# Altium PCB PCB2.PcbDoc
Units mil, origin at the board's own origin, x right, y up, seen from the top; angles counter-clockwise.
Board outline 2090.05 x 2250.22 mil, 2 copper layers (Top Layer, Bottom Layer); 57 components, 45 nets, 467 pads, 88 vias.
Unrouted connection lines stored in the file: 1.
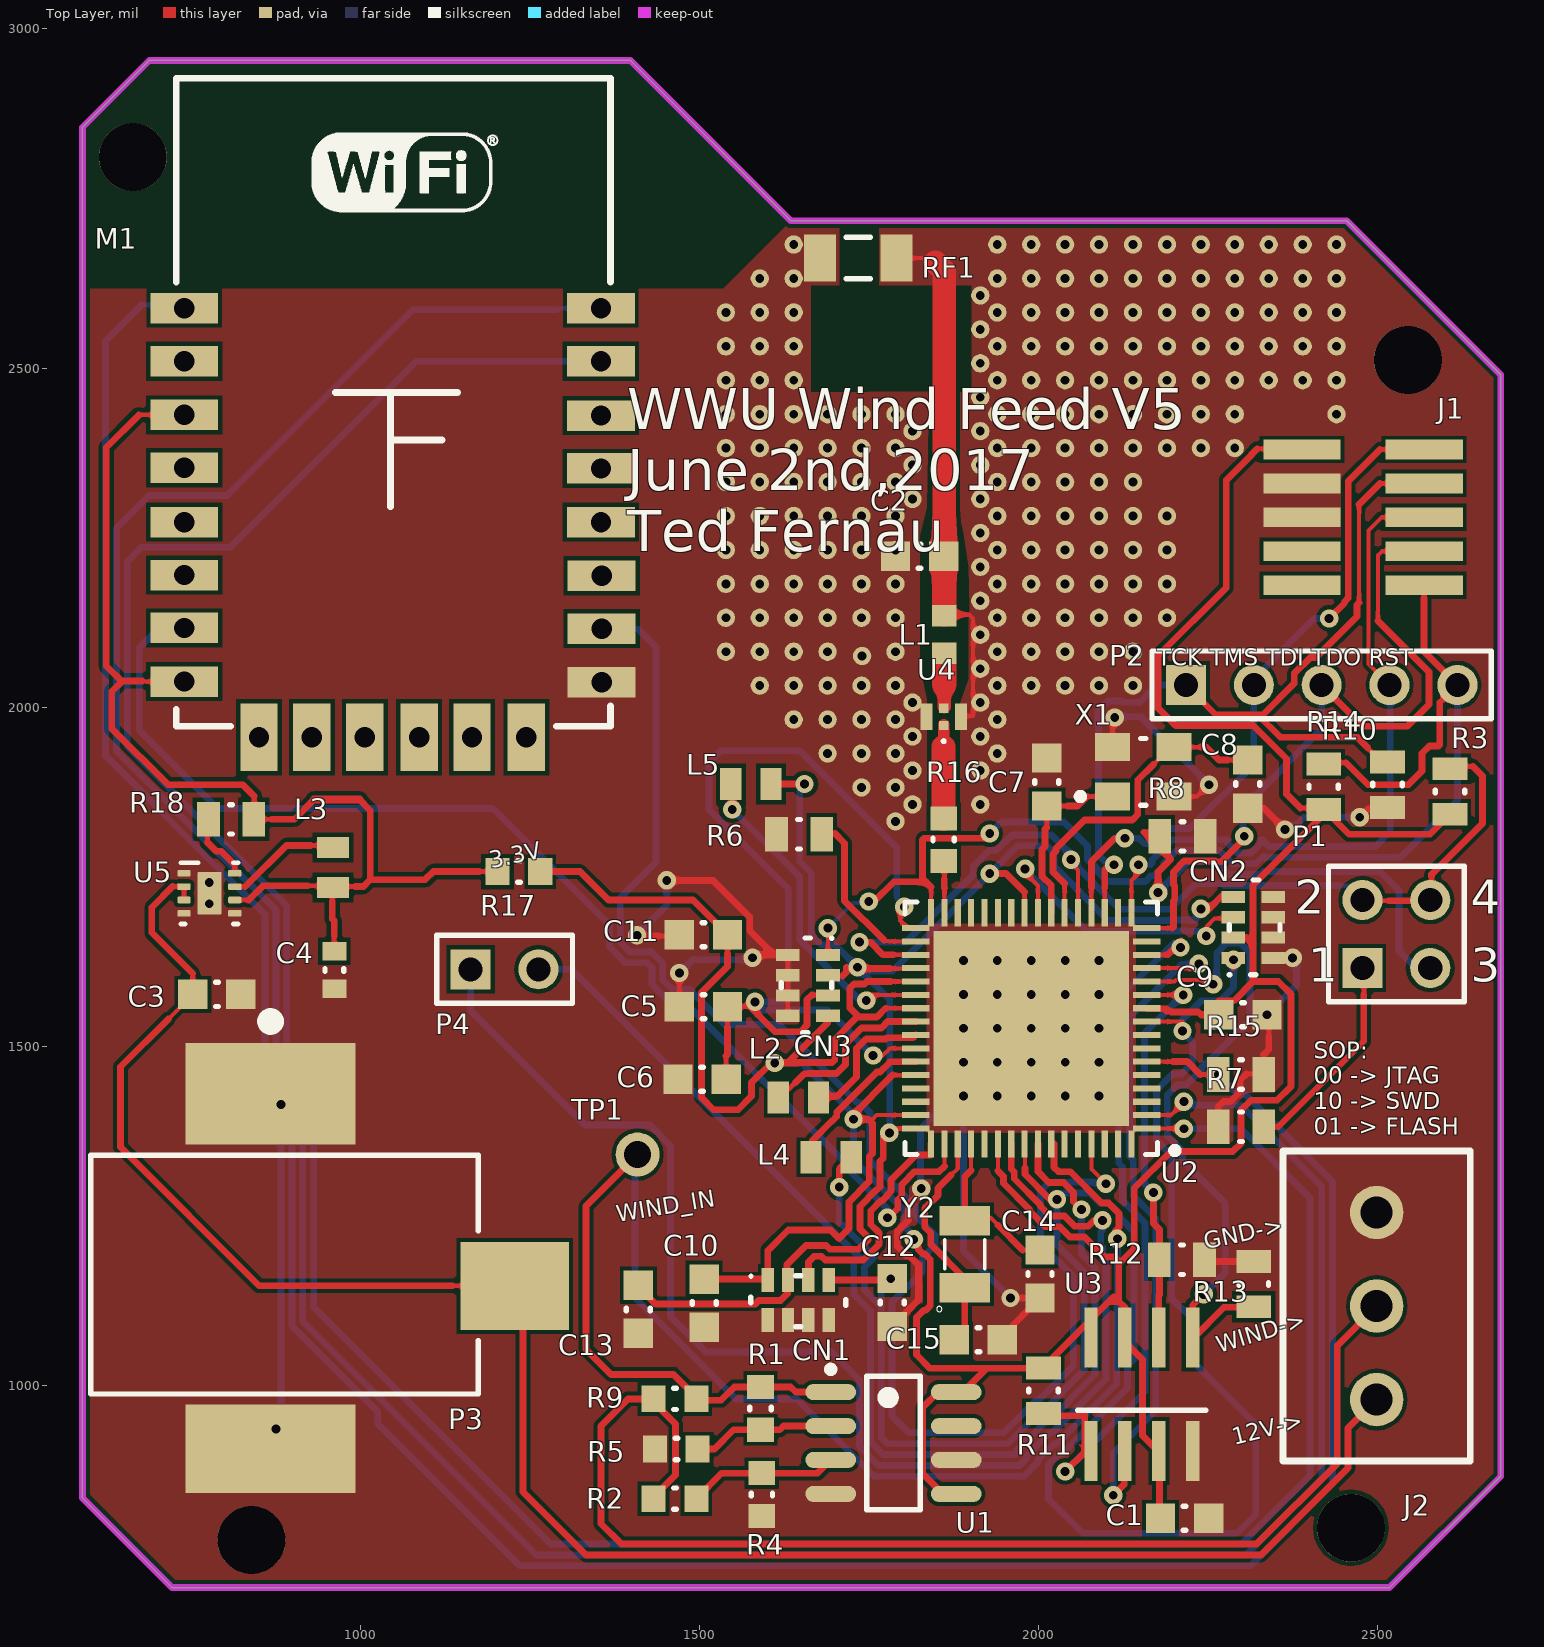
[diagram p0: Top Layer view]
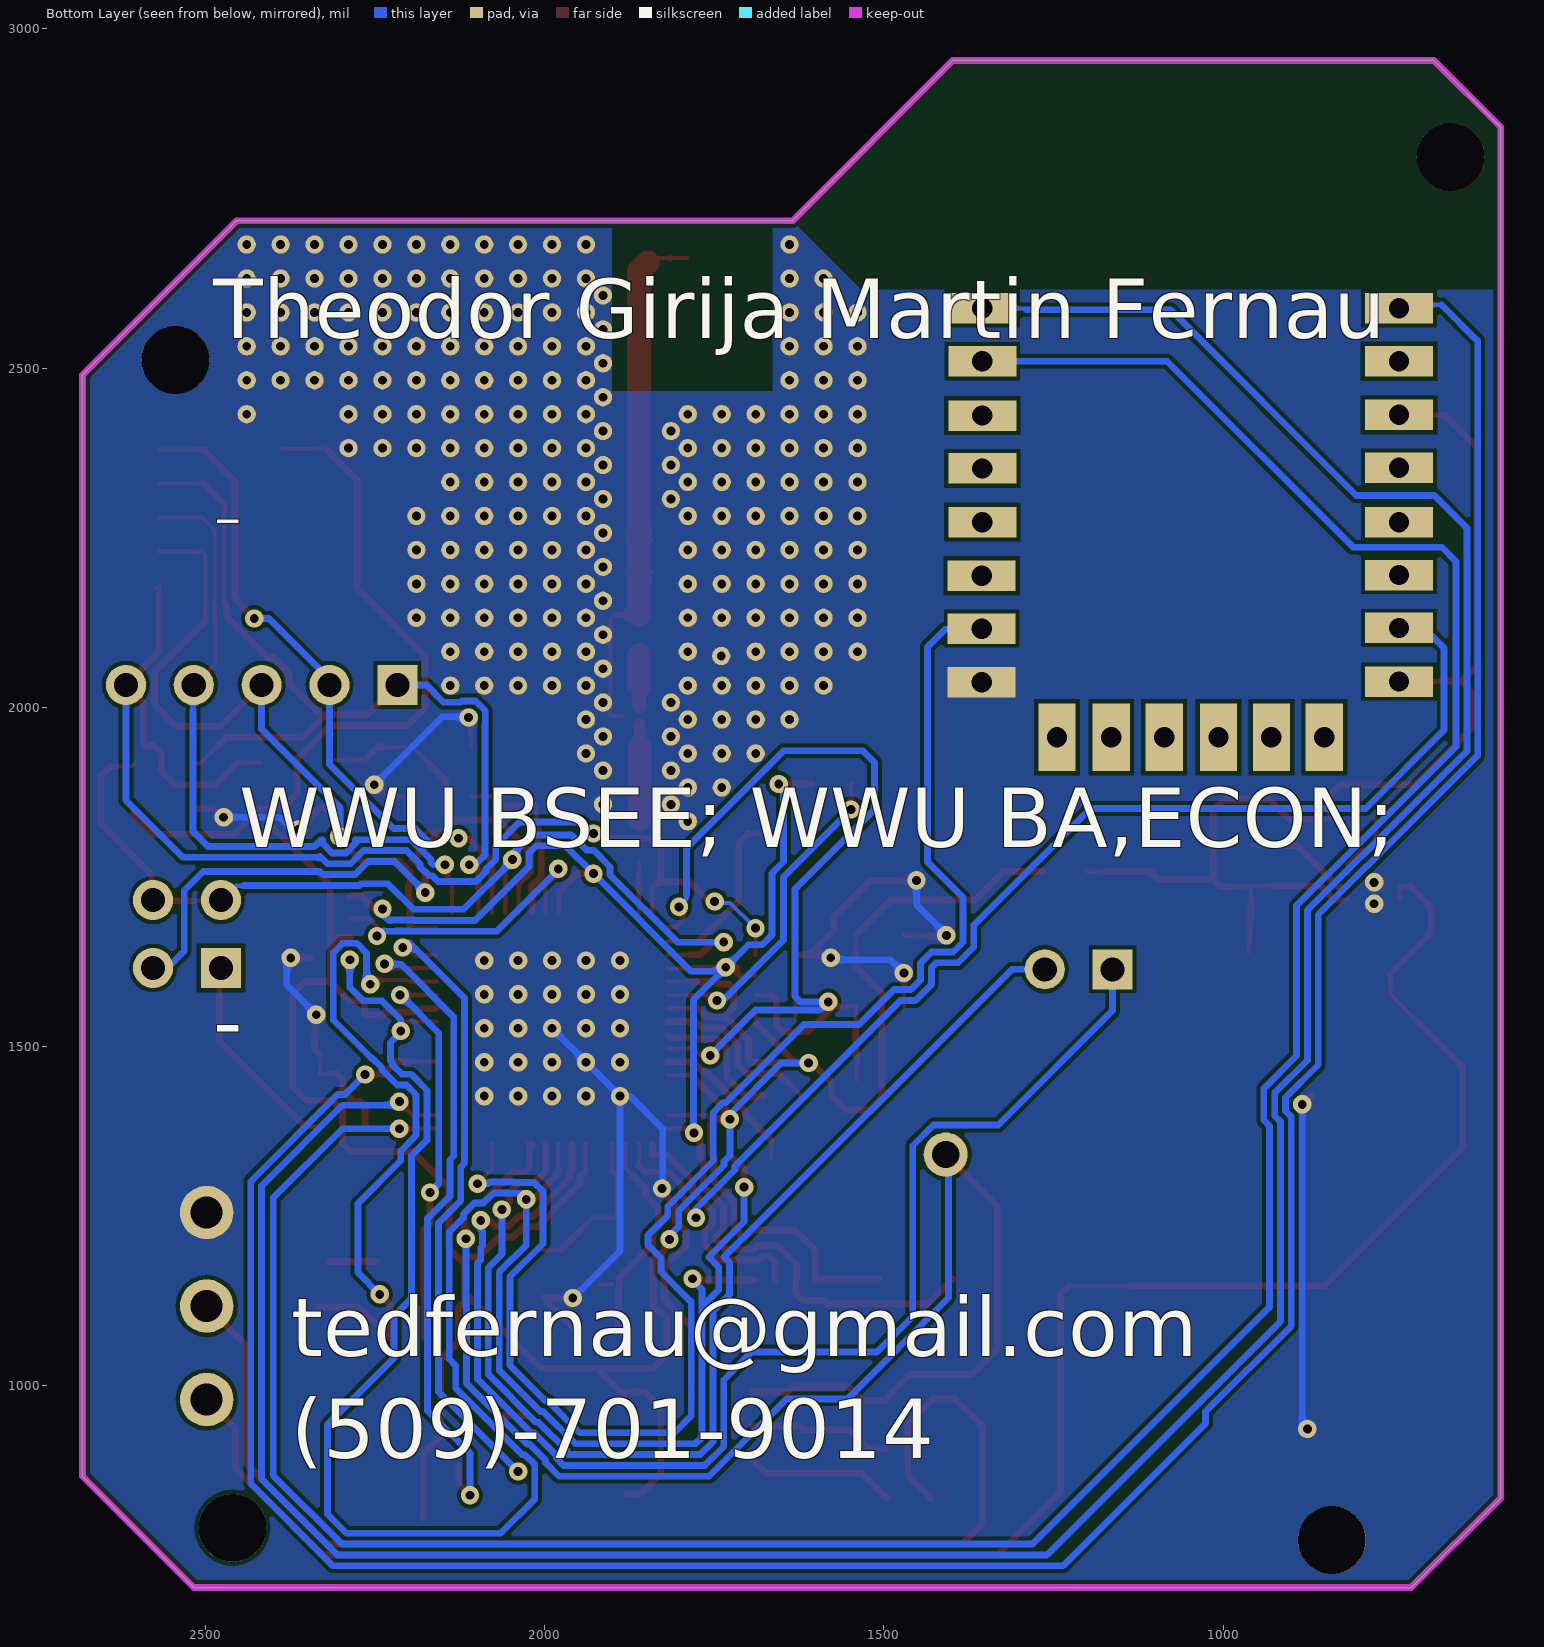
[diagram p1: Bottom Layer view, seen from below]

## Layer stack, top to bottom
Top Solder: solder mask 0.4, Solder Resist, Dk 3.5
Top Layer: signal copper 1.4
Dielectric 1: dielectric 12.6, FR-4, Dk 4.8
Bottom Layer: signal copper 1.4
Bottom Solder: solder mask 0.4, Solder Resist, Dk 3.5

## Board outline
723,703 590.95,835.05 590.95,2854.8 689.38,2953.22 1398.69,2953.22 1634.91,2717 2454,2717 2681,2490 2681,867 2517,703

## Design rules (kind name [scope] priority, off if disabled: settings)
Clearance [All] p1: gap=6 ignorepadtopadclearanceinfootprint=FALSE except(0: Arc-Hole Track-Hole SMDPad-Hole THPad-Hole Via-Hole Fill-Hole Poly-Hole Region-Hole Text-Hole)
HoleSize [All] p1: absolutevalues=TRUE maxlimit=100 minlimit=13 maxpercent=80.000 minpercent=20.000
PolygonConnect PolygonConnect_2 [All vs IsNamedPolygon('GND_POUR')] p1: connectstyle=Direct reliefconductorwidth=10 reliefentries=4 polygonreliefangle="90 Angle" airgapwidth=10
PolygonConnect PolygonConnect_1 [All vs IsNamedPolygon('GND_POUR')] p2: connectstyle=Direct reliefconductorwidth=10 reliefentries=4 polygonreliefangle="90 Angle" airgapwidth=10
PolygonConnect [All] p3: connectstyle=Relief reliefconductorwidth=10 reliefentries=4 polygonreliefangle="90 Angle" airgapwidth=10
RoutingVias [All] p1: holewidth=13 width=27 viastyle="Through Hole" minholewidth=13 minwidth=27 maxholewidth=28 maxwidth=50
SilkToBoardRegionClearance [All] p1 off:
SilkToSilkClearance [All] p1 off: silktosilkclearance=10
SilkToSolderMaskClearance [IsPad] p1 off: minsilkscreentomaskgap=10 clearancetoexposedcopper=TRUE
SolderMaskExpansion [All] p1: expansion=4
Width [All] p1: maxlimit=35 minlimit=6 preferedwidth=6
26 further rules are at their usual default settings.

## Components (designator, comment, footprint, x,y, rotation, side; value= is the part's Value field where it differs from the comment)
C1 "CAP 10uF 10V 0603(1608)" CAPC0603(1608)100_M#1 2215,805 r180 top
C2 "CAP 10uF 10V 0603(1608)" CAPC0603(1608)100_M#1 1824.43,2222.5 r0 top
C3 "CAP 10uF 10V 0603(1608)" CAPC0603(1608)100_M#2 789,1577 r180 top
C4 "22uF" CAPC0603(1608)100_L 962,1613 r90 top
C5 "CAP 10uF 10V 0603(1608)" CAPC0603(1608)100_M#2 1506,1559 r180 top
C6 "CAP 10uF 10V 0603(1608)" CAPC0603(1608)100_M#1 1504,1452 r180 top
C7 "CAP 10uF 10V 0603(1608)" CAPC0603(1608)100_M#2 2012,1890 r270 top
C8 "CAP 10uF 10V 0603(1608)" CAPC0603(1608)100_M#2 2308,1887 r90 top
C9 "CAP 10uF 10V 0603(1608)" CAPC0603(1608)100_M#2 2301,1547 r180 top
C10 "CAP 10uF 10V 0603(1608)" CAPC0603(1608)100_M#2 1507,1122 r90 top
C11 "CAP 10uF 10V 0603(1608)" CAPC0603(1608)100_M#2 1506,1665 r0 top
C12 "CAP 10uF 10V 0603(1608)" CAPC0603(1608)100_M#1 1784,1123 r270 top
C13 "CAP 10uF 10V 0603(1608)" CAPC0603(1608)100_M#1 1410,1113 r270 top
C14 "CAP 10uF 10V 0603(1608)" CAPC0603(1608)100_M#1 2002,1165 r90 top
C15 "CAP 10uF 10V 0603(1608)" CAPC0603(1608)100_M#1 1911,1068 r180 top
CN1 ".1uF" "CAP. ARRAY 0612" 1646,1127 r0 top
CN2 ".1uF" "CAP. ARRAY 0612" 2316,1676 r90 top
CN3 ".1uF" "CAP. ARRAY 0612" 1660,1590 r270 top
J1 "JTAG HEADER" FTSH-105-01-L-DV-K 2478,2280 r90 top
J2 "Screw Term" "SCREW TERM 3 PIN 3.5mm" 2498,980 r90 top
L1 "Inductor" 1608[0603] 1860.85,2107.2 r90 top
L2 "MLZ2012N100LT" TDK-IND0805-125_V 1646,1425 r0 top
L3 "MLZ2012N100LT" TDK-IND0805-125_V 960,1764 r270 top
L4 "MLZ2012N100LT" TDK-IND0805-125_V 1694,1337 r0 top
L5 "MLZ2012N100LT" TDK-IND0805-125_V 1576,1887 r180 top
M1 "ESP8266 ESP-12E" "ESP8266 ESP-12-E" 1394,1942 r0 top
P1 "Header 2X2" HDR2X2 2477,1616 r0 top
P2 "Header 5" HDR1X5 2217,2033 r0 top
P3 "RASM722X" SWIT-RASM722X_V 1048,1169 r270 top
P4 "Header 2" HDR1X2 1163,1614 r0 top
R1 "DNP" RESC0603(1608)_N#1 1590,967 r90 top
R2 "DNP" RESC0603(1608)_N#1 1464,834 r180 top
R3 "270" RESC0805(2012)_L#1 2606,1876 r270 top
R4 "DNP" RESC0603(1608)_N#1 1592,840 r90 top
R5 "DNP" RESC0603(1608)_N#1 1466,907 r0 top
R6 "100K" RESC0805(2012)_L#2 1647,1813 r0 top
R7 "100K" RESC0805(2012)_L#1 2298,1382 r0 top
R8 "2.7K" RESC0805(2012)_L#1 2212,1810 r180 top
R9 "0 Ohm" RESC0603(1608)_N#1 1464,981 r180 top
R10 "100K" RESC0805(2012)_L#1 2514,1886 r90 top
R11 "100K" RESC0805(2012)_L#1 2007,993 r90 top
R12 "100K" RESC0805(2012)_L#1 2211,1186 r180 top
R13 "100K" RESC0805(2012)_L#1 2317,1150 r270 top
R14 "100K" RESC0805(2012)_L#1 2420,1883 r270 top
R15 "2.7K" RESC0805(2012)_L#1 2298,1459 r180 top
R16 "0 Ohm" RESC0603(1608)_N#2 1860,1805 r270 top
R17 "0 Ohm" RESC0603(1608)_N#2 1234,1758 r180 top
R18 "100K" RESC0805(2012)_L#1 810,1835 r0 top
RF1 "Chip Antenna" TAYO-AH316M-2_N 1734.16,2662 r180 top
TP1 "5001" Keystone_5001 1409,1341 r0 top
U1 "LM358MX" M08A_L 1786,916 r0 top
U2 "CC3200" TI-RGC64-7300X7300TP_L 1989.04,1527.08 r180 top
U3 "16MBIT FLASH" 8SOIC 2152,988 r90 top
U4 "2.4 GHz BPF" TDK-DEA202450BT-1294C1-H_V 1860,1986 r180 top
U5 "Buck Regulator" DSG0008A_V 748,1686 r0 top
X1 "40MHz Crystal" AVX-CX3225GB-4_V 2154,1905 r0 top
Y2 "32.7kHz Crystal" XTAL320X150X90 1891,1194 r90 top

## Footprints (in the part's own frame and the unit in brackets; to place one, negate y for a bottom-side part, rotate by r counter-clockwise, add the part's x,y. Pads: shape width x height; smd on the part's side, far side on the other; paste and mask are expansions set on the pad)
8SOIC [mm]
  rect 2.25x0.5 smd: 1(-2.125,1.905) 2(-2.125,0.635) 3(-2.125,-0.635) 4(-2.125,-1.905) 5(2.125,-1.905) 6(2.125,-0.635) 7(2.125,0.635) 8(2.125,1.905)
  silkscreen extent -0.6,-2.4 -0.6,2.4, body extent -2.95,-2.45 2.95,2.45, height 1.5
1608[0603] [mm] "Chip Capacitor, Body 1.6x0.8mm, IPC High Density"
  rect 0.8x0.9 smd: 1(-0.7,0) 2(0.7,0)
  body extent -0.87,-0.48 0.87,0.48, height 1.3
AVX-CX3225GB-4_V [mm] "SMD, 4-Leads, Body 3.2x2.5mm, Height 0.9mm"
  rect 1.3x1.05 smd paste-0.051: 1(-1.15,-0.925) 2(1.15,-0.925) 3(1.15,0.925) 4(-1.15,0.925)
  silkscreen extent -2.47,-1.25 0.1,1.25, body extent -1.6,-1.25 1.6,1.25, height 0.9
"CAP. ARRAY 0612" [mm]
  rect 0.46x0.89 smd paste-0.051: 1(-1.148,0.745) 2(-0.388,0.745) 3(0.372,0.745) 4(1.132,0.745) 5(-1.148,-0.755) 6(-0.388,-0.755) 7(0.372,-0.755) 8(1.132,-0.755)
  silkscreen extent -1.78,-1.01 1.77,0.89, body extent -1.61,-0.81 1.59,0.69, height 1.35
CAPC0603(1608)100_L [mm]
  rect 0.7x0.9 smd paste-0.051: 1(-0.7,0) 2(0.7,0)
  silkscreen extent -0.05,-0.35 0.05,0.35, body extent -0.87,-0.47 0.88,0.48, height 1
CAPC0603(1608)100_M#1 [mm] "Chip Capacitor, Body 1.6x0.8mm, Height 1.0mm, IPC Low Density"
  rect 1.1x1.1 smd: 1(-0.9,0) 2(0.9,0)
  silkscreen extent -0.05,-0.45 0.05,0.45, body extent -0.87,-0.47 0.88,0.48, height 1
CAPC0603(1608)100_M#2 [mm] "Chip Capacitor, Body 1.6x0.8mm, Height 1.0mm, IPC Low Density"
  rect 1.1x1.1 smd paste-0.051: 1(-0.9,0) 2(0.9,0)
  silkscreen extent -0.05,-0.45 0.05,0.45, body extent -0.87,-0.47 0.88,0.48, height 1
DSG0008A_V [mm] "SON, 8-Leads, Body 2x2mm, Pitch 0.5mm, Thermal Pad 1.6x0.9mm, TI Recommended"
  rrect40% 0.5x0.25 smd paste-0.254: 1(-0.188,1.766) 2(-0.188,1.266) 3(-0.188,0.766) 4(-0.188,0.266) 5(1.712,0.266) 6(1.712,0.766) 7(1.712,1.266) 8(1.712,1.766)
  rrect11% 0.9x1.6 smd paste-0.051: 9(0.762,1.016)
  silkscreen extent -0.31,-0.13 1.84,2.17, body extent -0.29,-0.03 1.81,2.07, height 0.8
"ESP8266 ESP-12-E" [mil] "ESP8266 ESP-12-E"
  rect 100x45 hole 30: 1(-653,646) 2(-653,568) 3(-653,489) 4(-653,411) 5(-653,331) 6(-653,253) 7(-653,175) 8(-653,96) 15(-38,95) 16(-38,174) 17(-38,252) 18(-39,331) 19(-39,410) 20(-39,488) 21(-39,568) 22(-39,646)
  rect 55x100 hole 30: 9(-543,14) 10(-465,14) 11(-387,14) 12(-307,14) 13(-229,14) 14(-149,14)
  silkscreen extent -665,30 -25,985, body extent -661,37 -31,981, height 89
FTSH-105-01-L-DV-K [mm] "Samtec SMT 0.05\" pitch header, keyed 2 rows 10 positions"
  rect 0.74x2.9 smd paste-0.051: 1(2.54,2.286) 2(2.54,-2.286) 3(1.27,2.286) 4(1.27,-2.286) 5(0,2.286) 6(0,-2.286) 7(-1.27,2.286) 8(-1.27,-2.286) 9(-2.54,2.286) 10(-2.54,-2.286)
  body extent -3.14,-2.92 3.14,2.92, height 6.12
HDR1X2 [mm] "Connector; Header; 2 Position"
  rect 1.5x1.5 hole 0.9: 1(0,0)
  round 1.5 hole 0.9: 2(2.54,0)
  silkscreen extent -1.27,-1.27 3.81,1.27
HDR1X5 [mm] "Connector; Header; 5 Position"
  rect 1.5x1.5 hole 0.9: 1(0,0)
  round 1.5 hole 0.9: 2(2.54,0) 3(5.08,0) 4(7.62,0) 5(10.16,0)
  silkscreen extent -1.27,-1.27 11.43,1.27
HDR2X2 [mm] "Connector; Header; 2x2 Position"
  rect 1.5x1.5 hole 0.9: 1(0,0)
  round 1.5 hole 0.9: 2(0,2.54) 3(2.54,0) 4(2.54,2.54)
  silkscreen extent -1.27,-1.27 3.81,3.81
Keystone_5001 [mil] "TEST POINT PC MINI .040\"D BLACK"
  round 65 hole 40 paste-2: 1(0,0)
  body extent -50,-50 50,50, height 192
M08A_L [mm] "SOIC, 8-Leads, Body 4.9x3.9mm, Pitch 1.27mm, IPC High Density"
  oval 1.9x0.6 smd paste-0.051: 1(-2.35,1.905) 2(-2.35,0.635) 3(-2.35,-0.635) 4(-2.35,-1.905) 5(2.35,-1.905) 6(2.35,-0.635) 7(2.35,0.635) 8(2.35,1.905)
  silkscreen extent -2.47,-2.5 1,2.88, body extent -2,-2.5 2,2.5, height 1.75
RESC0603(1608)_N#1 [mm] "Chip Resistor, Body 1.6x0.8mm, IPC Medium Density"
  rect 0.9x1 smd paste-0.051: 1(-0.8,0) 2(0.8,0)
  silkscreen extent -0.05,-0.4 0.05,0.4, body extent -0.85,-0.47 0.85,0.47, height 0.6
RESC0603(1608)_N#2 [mm] "Chip Resistor, Body 1.6x0.8mm, IPC Medium Density"
  rect 0.9x1 smd: 1(-0.8,0) 2(0.8,0)
  silkscreen extent -0.05,-0.4 0.05,0.4, body extent -0.85,-0.47 0.85,0.47, height 0.6
RESC0805(2012)_L#1 [mm] "Chip Resistor, Body 2.0x1.3mm, IPC High Density"
  rect 0.85x1.3 smd: 1(-0.85,0) 2(0.85,0)
  silkscreen extent -0.05,-0.55 0.05,0.55, body extent -1.1,-0.67 1.1,0.68, height 0.7
RESC0805(2012)_L#2 [mm] "Chip Resistor, Body 2.0x1.3mm, IPC High Density"
  rect 0.85x1.3 smd paste-0.051: 1(-0.85,0) 2(0.85,0)
  silkscreen extent -0.05,-0.55 0.05,0.55, body extent -1.1,-0.67 1.1,0.68, height 0.7
"SCREW TERM 3 PIN 3.5mm" [mm] "3 pin 3.5mm screw header"
  round 2 hole 1.2 paste-0.051: 1(0,0) 2(3.5,0) 3(7,0)
  silkscreen extent -2.3,-3.5 9.3,3.5, body extent -2.3,-4 9.3,3.5, height 8.4
SWIT-RASM722X_V [mm] "SMD, 3-Leads, Body 14.5x9mm"
  rect 3.81x6.35 smd: 1(-6.645,-4.57)
  rect 3.3x4.06 smd: 2(0.545,4.57)
  rect 3.3x6.35 smd: 3(6.645,-4.57)
  silkscreen extent -9.6,-11.3 4.59,3.2, body extent -7.5,-11.23 7.5,5.84, height 11.1
TAYO-AH316M-2_N [mm] "Chip, 2-Leads, Body 3.35x1.75mm, IPC Medium Density"
  rect 1.2x1.75 smd paste-0.051: 1(-1.425,0) 2(1.425,0)
  silkscreen extent -0.45,-0.78 0.45,0.78, body extent -1.68,-0.87 1.67,0.87, height 0.6
TDK-DEA202450BT-1294C1-H_V [mm] "SMD, 4-Leads, Body 2x1.25mm"
  rect 0.35x0.35 smd: 1(0,0.325) 3(0,-0.325)
  rect 0.45x1 smd: 2(0.65,0) 4(-0.65,0)
  silkscreen extent -0.05,0.86 0.05,0.96, body extent -1,-0.63 1,0.63, height 0.8
TDK-IND0805-125_V [mm] "Chip Inductor, 2-Leads, Body 2.0x1.2mm, Height 1.25mm"
  rect 0.8x1.2 smd: 1(-0.75,0) 2(0.75,0)
  body extent -1.1,-0.7 1.1,0.7, height 1.25
TI-RGC64-7300X7300TP_L [mm] "QFN, 64-Leads, Body 9.15x9.15mm, Pitch 0.50mm, Thermal Pad 7.30x7.30mm, IPC High Density"
  rect 1.016x0.229 smd paste-0.254: 1(-4.325,3.75) 2(-4.325,3.25) 3(-4.325,2.75) 4(-4.325,2.25) 5(-4.325,1.75) 6(-4.325,1.25) 7(-4.325,0.75) 8(-4.325,0.25) 9(-4.325,-0.25) 10(-4.325,-0.75) 11(-4.325,-1.25) 12(-4.325,-1.75) 13(-4.325,-2.25) 14(-4.325,-2.75) 15(-4.325,-3.25) 16(-4.325,-3.75) 33(4.325,-3.75) 34(4.325,-3.25) 35(4.325,-2.75) 36(4.325,-2.25) 37(4.325,-1.75) 38(4.325,-1.25) 39(4.325,-0.75) 40(4.325,-0.25) 41(4.325,0.25) 42(4.325,0.75) 43(4.325,1.25) 44(4.325,1.75) 45(4.325,2.25) 46(4.325,2.75) 47(4.325,3.25) 48(4.325,3.75)
  rect 0.229x1.016 smd paste-0.254: 17(-3.75,-4.325) 18(-3.25,-4.325) 19(-2.75,-4.325) 20(-2.25,-4.325) 21(-1.75,-4.325) 22(-1.25,-4.325) 23(-0.75,-4.325) 24(-0.25,-4.325) 25(0.25,-4.325) 26(0.75,-4.325) 27(1.25,-4.325) 28(1.75,-4.325) 29(2.25,-4.325) 30(2.75,-4.325) 31(3.25,-4.325) 32(3.75,-4.325) 49(3.75,4.325) 50(3.25,4.325) 51(2.75,4.325) 52(2.25,4.325) 53(1.75,4.325) 54(1.25,4.325) 55(0.75,4.325) 56(0.25,4.325) 57(-0.25,4.325) 58(-0.75,4.325) 59(-1.25,4.325) 60(-1.75,4.325) 61(-2.25,4.325) 62(-2.75,4.325) 63(-3.25,4.325) 64(-3.75,4.325)
  rect 7.3x7.3 smd paste-5.08: 65(0,0)
  silkscreen extent -5.5,-4.72 4.72,4.72, body extent -4.57,-4.57 4.57,4.57, height 1
XTAL320X150X90 [mm]
  rect 1.1x1.9 smd: 1(-1.25,0) 2(1.25,0)
  silkscreen extent -2.15,-0.75 0.55,1.05

## Part data
C1 C2 C3 C5 C6 C7 C8 C9 C10 C11 C12 C13 C14 C15: library part CMP-1035-02800-1, "CAP 10uF 10V ±20% 0603 (1608 Metric) Thickness 1mm SMD"
C4: library part CMP-1590-00005-1, "0603 (1608 Metric) Chip Capacitor"
CN1 CN2 CN3: library part "Cap. Array 0612"
J1: library part "JTAG 10 PIN HEADER", "10 pin 0.05\" pitch header for JTAG"
J2: library part "SCREW TERM 3.5mm 3pos"
L2 L3 L4 L5: library part CMP-0266-00001-1, "Multilayer Inductor, 10 uH, ±20%, 300 mOhm, 50MHz, 0805(2012)"
M1: library part "ESP8266 ESP-12-E", "ESP8266 ESP-12-E"
P1: "Header, 2-Pin, Dual row"
P2: "Header, 5-Pin"
P3: library part CMP-1772-00002-1, "Power Jack, 5 A, 250 V, 3-Pin SMD, RoHS, Bulk"
P4: "Header, 2-Pin"
R1 R2 R4 R5 R9 R16 R17: library part CMP-1012-00001-1, "Jumper 0603 (1608 Metric)"
R3 R6 R7 R8 R10 R11 R12 R13 R14 R15 R18: library part CMP-1013-00122-1, "100K 0.125W 5% 0805 (2012 Metric)  SMD"
RF1: library part CMP-1660-00004-1, "Chip Antenna, 2.4 to 2.5 GHz, -40 to 85 degC, 2-Pin SMD, Pb-Free, Tape and Reel"
TP1: library part "TEST POINT", "TEST POINT PC MINI .040\"D BLACK"
U1: library part CMP-0055-00630-1, "Low Power Dual Operational Amplifier, 8-pin Narrow SOIC"
U2: library part CMP-1530-00002-1, "SimpleLink Wi-Fi and Internet-of-Things Solution, a Single-Chip Wireless MCU, 2.1 to 3.6 V, -40 to 85 degC, 64-Pin PQFN (RGC64), Green (RoHS & no Sb/Br), Tray"
U3: library part "FLASH SPI 16MBIT", "16 MBIT FLASH SPI 8SOIC"
U4: library part CMP-1663-00013-1, "2.4 GHz Filter"
U5: library part CMP-0323-00337-3, "Buck Step Down Regulator with 3 to 17 V Input and 3.3 V Output, -40 to 85 degC, 8-Pin WSON (DSG), Green (RoHS & no Sb/Br)"
X1: library part CMP-0614-00001-1, "Crystal Unit, 8 pF, 25000 kHz, -10 to 70 degC, 4-Pin 3.2 x 2.5 x 0.8 mm SMD, RoHS, Tape and Reel"
Y2: library part ABS07-32.768KHZ-T, "ABS07 Series 32.768 kHz %C2%B120 ppm 12.5 pF -40 to %2B85 %C2%B0C SMT Low Profile Crystal"

## Free pads (board coordinates)
  round 27 hole 13 paste-2: 230(1939,2682) 231(1939,2632) 232(1939,2582) 233(1939,2532) 234(1939,2482) 235(1939,2432) 236(1939,2382) 237(1939,2332) 238(1939,2282) 239(1939,2232) 240(1939,2182) 241(1939,2132) 242(1939,2082) 243(1939,2032) 244(1939,1982) 245(1939,1932) 250(1989,2032) 251(1989,2082) 252(1989,2132) 253(1989,2182) 254(1989,2232) 255(1989,2282) 256(1989,2332) 257(1989,2382) 258(1989,2432) 259(1989,2482) 260(1989,2532) 261(1989,2582) 262(1989,2632) 263(1989,2682) 264(2039,2682) 265(2089,2682) 266(2139,2682) 267(2189,2682) 268(2239,2682) 269(2289,2682) 270(2339,2682) 271(2389,2682) 272(2439,2682) 273(2439,2632) 274(2389,2632) 275(2339,2632) 276(2289,2632) 277(2239,2632) 278(2189,2632) 279(2139,2632) 280(2089,2632) 281(2039,2632) 282(2039,2582) 283(2089,2582) 284(2139,2582) 285(2189,2582) 286(2239,2582) 287(2289,2582) 288(2339,2582) 289(2389,2582) 290(2439,2582) 291(2439,2532) 292(2389,2532) 293(2339,2532) 294(2289,2532) 295(2239,2532) 296(2189,2532) 297(2139,2532) 298(2089,2532) 299(2039,2532) 300(2039,2482) 301(2139,2482) 302(2089,2482) 303(2189,2482) 304(2239,2482) 305(2289,2482) 306(2339,2482) 307(2389,2482) 308(2439,2482) 309(2039,2432) 310(2089,2432) 311(2139,2432) 312(2189,2432) 313(2239,2432) 314(2289,2432) 315(2039,2382) 316(2089,2382) 317(2139,2382) 318(2189,2382) 319(2239,2382) 320(2289,2382) 321(2039,2332) 322(2089,2332) 323(2139,2332) 324(2039,2282) 325(2089,2282) 326(2139,2282) 327(2189,2282) 328(2039,2232) 329(2089,2232) 330(2139,2232) 331(2189,2232) 332(2039,2182) 333(2089,2182) 334(2139,2182) 335(2189,2182) 336(2039,2132) 337(2089,2132) 338(2139,2132) 339(2189,2132) 340(2039,2082) 341(2089,2082) 342(2139,2082) 344(2039,2032) 345(2089,2032) 346(2139,2032) 350(2439,2432) 352(1639,2682) 353(1639,2632) 354(1639,2582) 355(1639,2532) 356(1639,2482) 357(1639,2432) 358(1689,2432) 359(1739,2432) 360(1789,2432) 361(1789,2382) 362(1789,2332) 363(1789,2282) 364(1789,2232) 365(1789,2182) 366(1789,2132) 367(1789,2082) 368(1789,2032) 369(1789,1982) 370(1789,1932) 371(1789,1882) 372(1789,1832) 376(1739,1882) 377(1739,1932) 378(1739,1982) 379(1739,2032) 380(1739.79,2075.7) 381(1739,2132) 382(1739,2182) 383(1739,2232) 384(1739,2282) 385(1739,2332) 386(1739,2382) 387(1689,2382) 388(1689,2332) 389(1689,2282) 390(1689,2232) 391(1689,2182) 392(1689,2132) 393(1689,2082) 394(1689,2032) 395(1689,1982) 396(1689,1932) 398(1589,2632) 399(1589,2582) 400(1589,2532) 401(1589,2482) 402(1589,2432) 403(1589,2382) 404(1589,2332) 405(1589,2282) 406(1589,2232) 407(1589,2182) 408(1589,2132) 409(1589,2082) 410(1589,2032) 412(1639,2382) 413(1639,2332) 414(1639,2282) 415(1639,2232) 416(1639,2182) 417(1639,2132) 418(1639,2082) 419(1639,2032) 420(1639,1982) 421(1539,2082) 422(1539,2132) 423(1539,2182) 424(1539,2232) 425(1539,2282) 426(1539,2332) 427(1539,2382) 428(1539,2432) 429(1539,2482) 430(1539,2532) 431(1539,2582) 432(1814,2407) 433(1814,2357) 434(1814,2307) 435(1914,2607) 436(1914,2557) 437(1914,2507) 438(1914,2457) 439(1914,2407) 440(1914,2357) 441(1914,2307) 442(1914,2257) 443(1914,2207) 444(1914,2157) 445(1914,2107) 446(1914,2057) 447(1914,2007) 448(1914,1957) 449(1914,1907) 450(1914,1857) 451(1814,1857) 452(1814,1907) 453(1814,1957) 454(1814,2007)
  round 100 hole 100 paste-2: 455(2460,791) 456(840,773) 457(665,2811) 458(2544,2512)

## Via types
v1: diameter 27, hole 13, Top Layer to Bottom Layer, tented both sides, 88 vias

## Nets (pads, with @x,y where several pads share a name; then routed paths per layer and width w, separated by ;. In a path a pad name is that pad's centre, name@x,y a point inside that pad or via, vN(x,y) a via of type N, cw(c..) or ccw(c..) an arc to the next point about the centre after c; other vN are vias at no path point)
3V3: C1.2 C4.2 C9.2 C10.2 C11.2 CN1.1 CN2.2 CN3.4 J1.1 L3.2 M1.3 M1.8 R3.2 R11.2 R14.2 R17.1 R17.2 R18.2 U1.5 U1.8 U2.10 U2.37 U2.39 U2.44 U2.47 U2.54 U3.3 U3.7 U3.8 U5.6 | length 7830.7
  Top Layer w6: 674,2431 M1.3 ; 679,2039 680,2038 M1.8 ; U5.6 829.84,1716.16 830,1716 836,1716 ; 844.15,1868.85 844.15,1835.1 869.9,1835.1 ; 923,1737 958.53,1737 L3.2@959,1737.47 ; 959,1713 L3.2@959,1737.47 ; C4.2 962,1664 ; 993,1736 960.47,1736 L3.2@959,1737.47 ; 1176,1758 R17.2@1200.5,1758 ; 1541.43,1637.43 C11.2 ; CN1.1@1599.72,1157.43 CN1.1 ; 1689,1535 1689,1545.09 CN3.4 ; v1(1727,1393) 1755,1393 1761.13,1399.13 U2.47 ; 1775.39,1556.61 U2.39 ; 1782,1596 U2.37@1818.74,1596 ; 1784.82,1458.18 U2.44 ; U2.54 1940,1356.63 1940,1317 ; U2.10 U2.10@2159.92,1556 ; 2322,2381 2387,2381 J1.1 ; 2385.54,1851.54 R14.2@2419,1851.54
  Top Layer w10: 649,2038 626,2061 626,2383 674,2431 ; 679,2039 650,2039 634,2023 634,1969 717,1886 827,1886 844.15,1868.85 ; 836,1716 857,1737 923,1737 ; 869.9,1835.1 903.1,1835.1 932,1864 ; 959,1713 959,1688 962,1685 962,1664 ; 993,1736 1005,1736 1015,1746 ; 999,1864 1015,1848 1015,1746 ; 1176,1758 1108,1758 1096,1746 1015,1746 ; R17.1 1324,1758 1366,1716 1490.43,1716 C11.2 ; C10.2 CN1.1@1599.72,1157.43 ; 1541.43,1637.43 1541.43,1617.86 1503.22,1579.65 1503.22,1532.79 1503,1532.57 1503,1425 1521,1407 1557,1407 1577,1427 1577,1447 1606.62,1476.62 1646,1476.62 ; CN1.1 1600.8,1199.8 1631,1230 1693.5,1230 1706,1217.5 1720.5,1232 1720.5,1271.4 1750.28,1301.18 1750.28,1337.81 1755,1342.53 1755,1387 1749,1393 v1(1727,1393) 1727,1394.36 1724,1397.36 1784.82,1458.18 ; 1689,1535 1630,1476 v1(1611,1476) 1645.38,1476 1646,1476.62 ; 1775.39,1556.61 1774.55,1556.61 1761.45,1543.5 1732.6,1543.5 ; 1782,1596 1747,1596 1743.5,1592.5 1728.18,1592.5 1721.5,1585.82 1721.5,1557.85 1732.6,1546.75 1732.6,1543.5 ; v1@1825,1216 v1(1816,1216) 1816,1210.85 1823,1203.85 1823,1200.92 1829.53,1194.39 1832.46,1194.39 1840.1,1186.75 1840.1,1118.11 1833.46,1111.47 1830.53,1111.47 1820,1100.94 1820,1046 1840,1026 2005,1026 2110.5,1131.5 ; U1.5 1859,841 1829,871 1829,968 1852,991 U1.8 ; U1.8@1883.26,986.26 1923,1026 ; 1940,1317 1948,1309 1948,1298.75 1986.5,1260.25 1986.5,1258.22 2010.22,1234.5 2031.22,1234.5 2046.22,1219.5 2067.5,1219.5 2097,1190 2112,1190 2118,1184 2118,1124.66 ; 2103.66,1124.66 2118,1124.66 ; 2118,1180 2140.8,1202.8 2140.8,1291.45 2194.76,1345.41 2285.82,1345.41 2298,1357.59 2298,1406.41 2312.59,1421 2351.34,1421 2371.69,1441.34 2371.69,1577.31 2353,1596 2316,1596 ; U2.10@2159.92,1556 2188.5,1556 2188.5,1552.42 2193.87,1552.42 2195.37,1550.92 2235.08,1550.92 2239,1547 C9.2 2265.57,1567.5 2287.5,1567.5 2316,1596 ; C1.2 2178,806.57 2178,902 2153,927 2153,1039 2127,1065 2127,1115.66 2118,1124.66 ; CN2.2 2306.28,1660.72 2316,1651 ; 2322,2381 2313.5,2372.5 2313.5,2371.85 2276.47,2334.82 2276.47,2176.47 2176,2076 2176,1999 2201.91,1973.09 2316.21,1973.09 2365,1924.3 2365,1872.07 2385.54,1851.54 ; R3.2 2576.46,1813 2457.53,1813 2419,1851.54 2419,1841.35 2316,1738.35 2316,1651 ; 1646,1476.62 1695.62,1476.62 1699.5,1480.5 1699.5,1510.4 1732.6,1543.5 ; 2316,1596 2316,1651
  Top Layer w12: 932,1864 999,1864
  Bottom Layer w10: v1(1611,1476) 1651.37,1476 1727,1400.37 v1(1727,1393) 1727,1339.45 1735.5,1330.95 1735.5,1325.22 1802.5,1258.22 1802.5,1234.87 1816,1221.37 v1(1816,1216)
12VDC: C3.2 J2.1 P3.2 U5.2 U5.3 | length 2902.2
  Top Layer w6: 717.57,1541 C3.2 753.57,1607.43 ; 723.84,1735.84 U5.2 U5.3 ; 1135.46,1147.54 P3.2
  Top Layer w10: 717.57,1541 647,1470.43 647,1352 851.46,1147.54 1135.46,1147.54 ; 723.84,1735.84 693,1705 693,1668 753.57,1607.43 ; P3.2 1240,1135.46 1240,844 1333,751 2327.63,751 2456,879.37 2456,938 J2.1
ADC_CH0: R1.2 R9.1 TP1.1 U1.1 U2.58 | length 2230.7
  Top Layer w6: v1@2114,1217 v1(2116,1217)
  Top Layer w10: TP1.1 1333,1265 1333,1054 1370,1017 1462,1017 1493,986 1493,983.5 R9.1 1497.5,979 1532,979 1551.5,998.5 R1.2 1634.5,998.5 1642,991 U1.1 ; U2.58 2022.75,1356.8 2022.75,1322.25 2029.2,1315.8 2046.55,1315.8 2092.85,1269.5 2103.15,1269.5 2118.5,1254.15 2118.5,1233.85 2114,1229.35 v1@2114,1217
  Bottom Layer w6: TP1.1@1405,1337 TP1.1
  Bottom Layer w10: TP1.1@1405,1337 1405,1130 1554,981 1643.49,981 1757.49,867 1978.51,867 1998.5,886.99 1998.5,890.78 2022.22,914.5 2026.01,914.5 2115,1003.49 2115,1115.49 2116,1116.49 v1(2116,1217)
GND: C1.1 C2.1 C2.2 C3.1 C4.1 C5.2 C6.2 C7.1 C8.1 C9.1 C10.1 C11.1 C12.2 C13.2 C14.1 C15.1 CN1.5 CN1.6 CN1.7 CN1.8 CN2.5 CN2.6 CN2.7 CN2.8 CN3.5 CN3.6 CN3.7 CN3.8 J1.3 J1.5 J2.3 L1.2 M1.15 P3.1 P3.3 pad.230 pad.231 pad.232 pad.233 pad.234 pad.235 pad.236 pad.237 pad.238 pad.239 pad.240 pad.241 pad.242 pad.243 pad.244 pad.245 pad.250 pad.251 pad.252 pad.253 pad.254 pad.255 pad.256 pad.257 pad.258 pad.259 pad.260 pad.261 pad.262 pad.263 pad.264 pad.265 pad.266 pad.267 pad.268 pad.269 pad.270 pad.271 pad.272 pad.273 pad.274 pad.275 pad.276 pad.277 pad.278 pad.279 pad.280 pad.281 pad.282 pad.283 pad.284 pad.285 pad.286 pad.287 pad.288 pad.289 pad.290 pad.291 pad.292 pad.293 pad.294 pad.295 pad.296 pad.297 pad.298 pad.299 pad.300 pad.301 pad.302 pad.303 pad.304 pad.305 pad.306 pad.307 pad.308 pad.309 pad.310 pad.311 pad.312 pad.313 pad.314 pad.315 pad.316 pad.317 pad.318 pad.319 pad.320 pad.321 pad.322 pad.323 pad.324 pad.325 pad.326 pad.327 pad.328 pad.329 pad.330 pad.331 pad.332 pad.333 pad.334 pad.335 pad.336 pad.337 pad.338 pad.339 pad.340 pad.341 pad.342 pad.344 pad.345 pad.346 pad.350 pad.352 pad.353 pad.354 pad.355 pad.356 pad.357 pad.358 pad.359 pad.360 pad.361 pad.362 pad.363 pad.364 pad.365 pad.366 pad.367 pad.368 pad.369 pad.370 pad.371 pad.372 pad.376 pad.377 pad.378 pad.379 pad.380 pad.381 pad.382 pad.383 pad.384 pad.385 pad.386 pad.387 pad.388 pad.389 pad.390 pad.391 pad.392 pad.393 pad.394 pad.395 pad.396 pad.398 pad.399 pad.400 pad.401 pad.402 pad.403 pad.404 pad.405 pad.406 pad.407 pad.408 pad.409 pad.410 pad.412 pad.413 pad.414 pad.415 pad.416 pad.417 pad.418 pad.419 pad.420 pad.421 pad.422 pad.423 pad.424 pad.425 pad.426 pad.427 pad.428 pad.429 pad.430 pad.431 pad.432 pad.433 pad.434 pad.435 pad.436 pad.437 pad.438 pad.439 pad.440 pad.441 pad.442 pad.443 pad.444 pad.445 pad.446 pad.447 pad.448 pad.449 pad.450 pad.451 pad.452 pad.453 pad.454 pad.456 pad.458 R4.1 R5.1 R6.1 R7.1 R8.1 R10.1 R12.1 R13.1 R15.1 RF1.1 RF1.2 U1.4 U1.6 U2.65 U3.4 U4.2 U4.4 U5.1 U5.4 U5.5 U5.9 X1.2 X1.4 | length 4077.9
  Top Layer w6: 1441,1663 1468.57,1663 C11.1 ; C5.2 v1(1470.57,1608.57) ; CN3.8 CN3.7 CN3.6 CN3.5 ; RF1.1 1841.83,2662 1842.15,2662.32 1848.06,2656.41 1848.06,2655.43 ; L1.2@1860.85,2136.72 1897.27,2136.72 1903.17,2130.82 1903.17,1987.12 U4.4@1885.59,1987.12 ; X1.4 2108.73,1981.73 v1(2112,1985) ; X1.2 2233.58,1868.58 v1(2251,1886) ; 2306,1460 2330.46,1460 R15.1@2331,1459.46 ; 2331,1488 R15.1@2331,1459.46 ; R15.1 R15.1@2331,1459.46 ; v1(2336.43,1547) 2339,1544.43 2339,1515
  Top Layer w10: P3.1 v1(883.69,1415) ; v1(1408,1664) 1409,1663 1441,1663 ; v1(1452,1745) 1520.3,1745 1574.09,1691.21 1574.09,1671.31 1610.2,1635.2 ; v1(1578.32,1631) 1579,1631 1583.2,1635.2 1610.2,1635.2 ; CN3.5 1610.2,1635.2 ; v1(1827,1291) 1828,1292 1828,1287.37 1808.35,1267.72 1808.35,1244.7 1791.5,1227.85 1791.5,1205.85 1806.27,1191.09 1810.21,1191.09 1823,1178.3 ; C15.1 1946.43,1074 C14.1 v1(1958.43,1129.57) ; R12.1@2247,1183.46 R13.1 ; R7.1 2264.54,1411.46 2272.07,1419 2282.41,1419 2297,1433.59 2297,1451 2306,1460 ; C8.1 2331.43,1851.57 v1(2363,1820) ; 2331,1488 2339,1496 2339,1515 ; CN2.5 v1(2374.2,1630.8) ; v1(2473,1838.07) 2485.46,1850.54 R10.1@2513,1850.54 ; 1823,1178.3 1824,1127.57 C12.2 1823,1126.57 1823,1178.3
  Top Layer w35: 1848.06,2655.43 1860.85,2642.63 L1.2@1860.85,2136.72
  Bottom Layer w6: v1@2111,1986 v1(2112,1985)
  Bottom Layer w10: v1(876,936.61) 883.69,944.31 v1(883.69,1415) ; v1(1408,1664) 1408,1665 1452,1709 v1(1452,1745) ; v1(1470.57,1608.57) 1490,1628 1575.32,1628 v1(1578.32,1631) ; v1(1827,1291) 1832,1296 1832,1286 1826,1292 1826,1379 1874.08,1427.08 v1(1889.04,1427.08) ; v1(1958.43,1129.57) 1889.04,1198.96 v1(1889.04,1427.08) ; v1(1989.04,1527.08) v1(1939.04,1477.08) v1(1889.04,1427.08) ; v1@2111,1986 2151,1986 v1(2251,1886) ; v1(2336.43,1547) 2380,1590.57 2380,1625 v1(2374.2,1630.8) ; v1(2363,1820) 2368,1815 2391.07,1838.07 v1(2473,1838.07)
  other v1: 1939.04,1427.08 1989.04,1427.08 2039.04,1427.08 2089.04,1427.08 1889.04,1477.08 1989.04,1477.08 2039.04,1477.08 2089.04,1477.08 1889.04,1527.08 1939.04,1527.08 2039.04,1527.08 2089.04,1527.08 1889.04,1577.08 1939.04,1577.08 1989.04,1577.08 2039.04,1577.08 2089.04,1577.08 1889.04,1627.08 1939.04,1627.08 1989.04,1627.08 2039.04,1627.08 2089.04,1627.08 777.68,1710.61 777.68,1742.1
NetC5_1: C5.1 C6.1 CN3.3 U2.33 U2.42 | length 1535.9
  Top Layer w6: C6.1 1539.43,1486.43 ; 1541.43,1528.57 C5.1 v1@1575,1559 ; 1667,1576 1688.7,1576 CN3.3 ; v1(1756,1487) 1768,1487 1769,1486 1780.55,1497.55 U2.42 ; v1(1802,1706) 1796,1700 1796,1686 1806,1676 1817.48,1676 U2.33
  Top Layer w10: 1539.43,1486.43 1541.43,1488.43 1541.43,1528.57 ; v1(1582,1566) 1575,1559 1575,1558.56 1611.56,1522 1648.96,1522 1658.78,1531.82 1658.78,1569.22 1665.56,1576 1667,1576
  Bottom Layer w6: v1(1756,1487) 1756,1484.59 v1@1757.79,1482.79 ; 1791,1724 1791,1717 v1(1802,1706)
  Bottom Layer w10: v1(1756,1487) 1689,1554 1594,1554 v1(1582,1566) 1623,1566 1631,1574 1631,1732.23 1514,1849.23 1514,1919 1531,1936 1648,1936 1791,1793 1791,1724
NetC7_2: C7.2 U2.23 X1.1 | length 268.3
  Top Layer w6: 2012,1823 C7.2 2042.57,1854.57 ; 2071.42,1868.58 X1.1
  Top Layer w10: 2012,1823 2009.5,1820.5 2009.5,1794.85 2005,1790.35 2005,1750.88 2018.57,1737.31 U2.23 ; 2042.57,1854.57 2057.4,1854.57 2071.42,1868.58
NetC8_2: C8.2 U2.22 X1.3 | length 485.9
  Top Layer w6: U2.22 2038.25,1740.25 ; 2169,1916 2194.42,1941.42 X1.3 2238.58,1941.42 ; 2278.57,1922.43 C8.2
  Top Layer w10: 2038.25,1740.25 2021,1757.5 2021,1783.72 2025.5,1788.22 2025.5,1792.13 2067.37,1834 2138,1834 2146,1842 2146,1893 2169,1916 ; 2238.58,1941.42 2246.58,1941.42 2265.57,1922.43 2278.57,1922.43
NetC12_1: C12.1 CN1.4 CN2.1 L4.2 U2.9 U2.56 | length 3335
  Top Layer w6: U2.56 1980,1356 1980,1321 ; U2.9 2212.08,1536.92 2212,1536.84 v1(2212,1523) ; CN2.1 2286.65,1614.65 2287,1615 v1(2287,1628)
  Top Layer w10: CN1.4 1781.91,1156.35 1782,1156.43 v1(1782,1158) ; v1(1706,1293) 1706,1319.47 L4.2 ; 1980,1321 1980,1312 2017,1275 v1(2027,1275)
  Bottom Layer w6: 2287,1612 v1(2287,1628)
  Bottom Layer w10: v1(1706,1293) 1706,1242 1758.15,1189.85 1743.5,1175.21 1743.5,1141.66 1768,1117.16 ; v1@1784.06,1158.43 1783.63,1158 v1(1782,1158) 1782,1156.43 1768,1142.43 1768,1117.16 ; v1(2287,1628) 2287,1587.35 2267.15,1567.5 2239.5,1567.5 2212,1540 v1(2212,1523) 2210,1523 2227,1506 2227,1478.74 2224.04,1475.78 2224.04,1473.04 2210.5,1459.5 2197.22,1459.5 2173.5,1435.78 2173.5,1362.22 2196,1339.72 2196,1129 2222,1103 2222,1041 2320,943 2320,811 2292,783 2065,783 2014.5,833.5 2014.5,884.15 2028.85,898.5 2032.64,898.5 2131,996.86 2131,1030 2140.5,1039.5 2140.5,1227.15 2119.5,1248.15 2119.5,1253.15 2103.15,1269.5 2089.97,1269.5 2075.45,1284.02 2073.63,1284.02 2073.15,1284.5 2052.85,1284.5 2052.37,1284.02 2028.63,1284.02 2027,1282.39 2028.39,1281 2027,1279.61 v1(2027,1275) 2027,1207.72 2067,1167.72 2067,1023.37 2006.13,962.5 2002.34,962.5 1954.84,915 1777.37,915 1768,924.37 1768,1117.16
NetC13_1: C13.1 CN1.2 CN2.4 CN3.2 L5.1 U2.25 U2.36 U2.48 | length 2227.5
  Top Layer w6: CN3.2 1690.62,1604 1711,1604 ; 1717,1617 v1(1733,1617) ; 1781,1615 1818.1,1615 U2.36 ; v1@1784.44,1379.44 U2.48 ; U2.25 1979.2,1727.8
  Top Layer w10: C13.1@1399,1157.43 1435.43,1121 1582.41,1121 1587.19,1125.78 1619.78,1125.78 1630,1136 1630,1155.62 1629,1156.62 1629,1179 1657,1207 1686.72,1207 1692.22,1201.5 1734.78,1201.5 1748.5,1215.22 1748.5,1219.22 1736.5,1231.22 1736.5,1264.78 1760.22,1288.5 1761.25,1288.5 1766.28,1293.53 1766.28,1331.18 1771,1335.9 v1@1771,1366 ; L5.1 v1(1655,1887) ; 1711,1604 1717,1610 1717,1617 ; v1(1733,1617) 1735,1615 1781,1615 ; v1(1780,1373) 1780,1375 v1@1784.44,1379.44 ; v1(1928,1755) 1952,1755 1979.2,1727.8 ; v1(2239,1703) 2251,1703 2271.22,1723.22 2284,1723.22 CN2.4
  Bottom Layer w10: v1(1655,1887) 1648,1880 1648,1772.51 1664.85,1755.66 1664.85,1664.51 1679.2,1650.15 1699.85,1650.15 v1(1733,1617) v1@1739,1611 ; v1(1780,1373) 1780.5,1373.5 1780.5,1569.5 v1@1739,1611 ; v1(2239,1703) 2246,1703 2229,1686 2226.28,1686 2225.78,1686.5 2192.22,1686.5 2191.72,1686 2102.43,1686 2023,1765.43 2023,1785.37 2012.37,1796 1969,1796 v1(1928,1755) 1784,1611 v1@1739,1611
NetC14_2: C14.2 U2.52 Y2.2 | length 243.3
  Top Layer w6: Y2.2@1891,1248.21 1928.65,1248.21 1940,1236.87 ; 1900.46,1317.46 U2.52 ; 1976.43,1200.43 C14.2
  Top Layer w10: Y2.2@1891,1248.21 1891,1308 1900.46,1317.46 ; 1940,1236.87 1976.43,1200.43
NetC15_2: C15.2 U2.51 Y2.1 | length 362.9
  Top Layer w6: 1870.77,1310.77 1880.77,1320.77 U2.51 ; Y2.1@1899.69,1149.79 Y2.1@1920,1149.79
  Top Layer w10: 1870.77,1310.77 1851.5,1291.5 1851.5,1280.85 1837.15,1266.5 1836.5,1266.5 1832,1262 1832,1234.65 1841,1225.65 1841,1208.48 1890,1159.48 Y2.1@1890,1142 ; C15.2 1891,1083.43 Y2.1
NetCN1_3: CN1.3 U2.49 | length 349.4
  Top Layer w6: U2.49@1841,1356.4 U2.49
  Top Layer w10: CN1.3 1660.65,1182.65 1669,1191 1680.1,1191 1685.6,1185.5 1741.5,1185.5 1764.5,1208.5 1764.5,1225.85 1752.5,1237.85 1752.5,1258.15 1766.85,1272.5 1768.85,1272.5 1776.35,1280 1776.35,1280.98 1782.28,1286.9 1782.28,1303.55 1819.22,1340.5 1841,1340.5 U2.49@1841,1356.4
NetCN2_3: CN2.3 U2.24 | length 442.7
  Top Layer w6: v1(1980,1762) 1980,1756 1998.88,1737.12 U2.24 ; v1(2247,1663) 2247,1676.71 2259.29,1689 2285.01,1689 CN2.3
  Bottom Layer w6: v1@1979,1762 v1(1980,1762)
  Bottom Layer w10: v1@1979,1762 2071,1670 2198.35,1670 2198.85,1670.5 2219.15,1670.5 2219.65,1670 2235.63,1670 2236.49,1670.86 2244.35,1663 v1(2247,1663)
NetJ1_2: J1.2 P2.2 U2.20 | length 999.6
  Top Layer w6: U2.20 2077.62,1734.38 ; 2503,2380 J1.2
  Top Layer w10: 2077.62,1734.38 2077.62,1772.62 2112,1807 v1(2127,1807) ; v1(2428,2131) 2451,2154 2451,2155.79 2456.09,2160.88 2456.09,2333.09 2503,2380
  Bottom Layer w10: v1(2127,1807) 2148.1,1807 2156.1,1799 2168.1,1799 2190.6,1821.5 2222.5,1821.5 2317,1916 P2.2 2317,2042 2406,2131 v1(2428,2131)
NetJ1_4: J1.4 P2.1 R10.2 U2.19 | length 1310.5
  Top Layer w6: U2.19 2097.31,1734.69 ; 2472.09,2154.25 2472.09,2299.09 ; 2485,1940 2507.54,1917.46 R10.2@2513,1917.46 ; 2503,2330 J1.4
  Top Layer w10: 2097.31,1734.69 2097.31,1760.31 2105,1768 v1(2111,1768) ; P2.1 2260.91,1989.09 2322.84,1989.09 ; 2472.09,2154.25 2469,2151.16 2469,2134 2408.53,2073.53 2400.21,2073.53 2376.47,2049.79 2376.47,2035.16 2330.4,1989.09 2322.84,1989.09 ; 2472.09,2299.09 2503,2330 ; 2485,1940 2469,1956 2355.92,1956 2322.84,1989.09
  Bottom Layer w10: v1(2111,1768) 2115,1768 2114.5,1768.5 2102.15,1768.5 2088,1782.65 2088,1974.35 2087.5,1974.85 2087.5,1995.15 2101.85,2009.5 2122.15,2009.5 2124.15,2007.5 2149.15,2007.5 2163.5,2021.85 2163.5,2022.5 2174,2033 P2.1
NetJ1_6: J1.6 P2.4 U2.17 | length 1046.5
  Top Layer w6: U2.17 2136.68,1744.68 2147,1755 v1(2147,1768) ; P2.4 2485.91,2064.09 2485.91,2133.26 2486.09,2133.43 2486.09,2160.05 2485.91,2160.22 2485.91,2260.91 2505,2280 J1.6
  Bottom Layer w6: v1(2147,1768) 2164,1768 ; P2.4 2518,2032 2518,1996
  Bottom Layer w10: 2164,1768 2167.5,1771.5 2167.5,1775.78 2196.72,1805 2278.5,1805 2278.5,1799.85 2292.85,1785.5 2313.15,1785.5 2327.5,1799.85 2327.5,1805 2329.16,1805 2339.16,1795 2496,1795 2518,1817 2518,1996
NetJ1_8: J1.8 P2.3 U2.16 | length 1051.7
  Top Layer w6: U2.16 2196.72,1674.72 ; 2499.91,2127.46 2499.91,2224.09 2505.83,2230 J1.8
  Top Layer w10: 2196.72,1674.72 2198.5,1676.5 2198.5,1714.85 2200.5,1716.85 2200.5,1737.15 2198.5,1739.15 2198.5,1757.5 2214.41,1773.41 2260.24,1773.41 2261.24,1772.41 2268.75,1772.41 2303,1806.66 v1(2303,1810) ; P2.3 2478,1972 2543,1972 2575,2004 2575,2052.37 2499.91,2127.46
  Bottom Layer w10: v1(2303,1810) 2303,1805 2301,1807 2301,1852 2417,1968 P2.3
NetL1_1: L1.1 U4.3 | length 77.1
  Top Layer w20: U4.3@1860.6,2000.65 1860.6,2013.43 1860.85,2013.68 1860.85,2031.41
  Top Layer w35: 1860.85,2031.41 L1.1@1860.85,2077.67
NetL2_1: L2.1 U2.40 | length 260.9
  Top Layer w6: L2.1@1621.44,1427 1641.44,1447
  Top Layer w10: 1641.44,1447 1654.44,1460 1659.6,1460 1660.22,1460.62 1700.83,1460.62 1701.45,1460 1701.63,1460 1715.5,1473.87 1715.5,1503.78 1739.22,1527.5 1768.07,1527.5 1777.5,1536.92 U2.40
NetL2_2: L2.2 U2.41 | length 210.4
  Top Layer w6: L2.2@1676.56,1427 L2.2@1680.93,1431.37
  Top Layer w10: L2.2@1676.56,1427 1703.37,1427 1731.5,1455.13 1731.5,1497.15 1745.85,1511.5 1774.7,1511.5 1776.25,1513.05 1814.58,1513.05 U2.41
NetL3_1: L3.1 U5.7 | length 168.7
  Top Layer w6: U5.7 830.84,1735.84 ; 927.47,1796.53 L3.1@959,1796.53
  Top Layer w10: 830.84,1735.84 891.53,1796.53 927.47,1796.53
NetL4_1: L4.1 U2.43 | length 229.4
  Top Layer w6: L4.1@1666.44,1337 1666.44,1361.72
  Top Layer w10: 1666.44,1361.72 1695.1,1390.38 1695.83,1390.38 1702.28,1396.82 1702.28,1403.28 1761.5,1462.5 1766.15,1462.5 1780.5,1476.85 1780.5,1477.7 1780.67,1477.87 U2.43
NetL5_2: L5.2 U2.38 | length 491.3
  Top Layer w6: v1(1548.44,1849.44) L5.2@1548.44,1887 ; v1@1737,1568 v1(1746,1568) 1754.29,1576.29 U2.38
  Bottom Layer w10: v1(1548.44,1849.44) 1648,1749.88 1648,1657 1737,1568 v1(1746,1568)
NetP1_1: P1.1 R7.2 | length 308.6
  Top Layer w6: R7.2 2353,1382 ; P1.1 2479,1614 2479,1576
  Top Layer w10: 2353,1382 2479,1508 2479,1576
NetP1_2: P1.2 P1.4 R3.1 U2.21 U2.35 | length 1432.7
  Top Layer w6: 1785.35,1635.35 U2.35 ; v1(2047.5,1775.58) 2055,1768.08 2055,1763 2058,1760 2058,1697.42 U2.21 ; P1.2@2479,1715 2516,1715 ; 2545,1715 2579,1715 2579,1751 ; R3.1@2606,1915.46 2608.46,1913 2640,1913
  Top Layer w10: v1(1736,1654) 1752.17,1654 1770.82,1635.35 1785.35,1635.35 ; 2516,1715 2545,1715 ; 2579,1751 2579,1754 2654,1829 2654,1899 2640,1913
  Bottom Layer w6: v1(2047.5,1775.58) v1@2047.5,1783.5 ; 2443,1737 2456,1737 P1.2
  Bottom Layer w10: v1(1736,1654) 1804.37,1654 1903.5,1753.13 1903.5,1765.15 1927.85,1789.5 1938.15,1789.5 1960.65,1812 2019,1812 v1@2047.5,1783.5 ; v1(2047.5,1775.58) 2047.5,1774.22 2119.22,1702.5 2193.5,1702.5 2231,1740 2270.47,1740 2272.97,1737.5 2442.5,1737.5 2443,1737
NetP1_3: P1.3 R8.2 | length 680.7
  Top Layer w6: 2155,1816 2172.54,1816 R8.2
  Top Layer w10: 2155,1816 2194.69,1776.31 2176,1757.63 v1(2176,1727)
  Bottom Layer w10: v1(2176,1727) 2176,1728 2221,1773 2260.1,1773 2279.6,1753.5 2326.4,1753.5 2330.9,1758 2503,1758 2531,1730 2531,1641 2556,1616 P1.3
NetP4_1: P4.1 U2.55 | length 1989
  Top Layer w10: U2.55 1959.51,1320.12 1964,1315.63 1964,1305.37 2002.5,1266.87 2002.5,1264.85 2016.85,1250.5 2037.85,1250.5 2052.85,1235.5 2073.15,1235.5 2081.65,1244 v1(2094,1244)
  Bottom Layer w10: P4.1 1163,1553 1331.5,1384.5 1427.02,1384.5 1457.52,1354 1457.52,1102.48 1510,1050 1695,1050 1736,1009 1736,911.12 1764.12,883 1971.88,883 1982.5,893.62 1982.5,897.4 2015.6,930.5 2019.38,930.5 2099,1010.12 2099,1180.98 2094,1185.98 2094,1204.35 2091.5,1206.85 2091.5,1227.15 2094,1229.65 v1(2094,1244)
NetP4_2: P4.2 U2.57 | length 1711.3
  Top Layer w10: U2.57 1998.88,1315.75 2014.82,1299.8 2036.84,1299.8 2051.5,1285.15 2051.5,1271.5 v1(2063,1260)
  Bottom Layer w10: P4.2 1311.35,1614 1735.51,1189.84 1727.5,1181.84 1727.5,1135.03 1752,1110.53 1752,917.75 1770.75,899 1965.25,899 1966.5,900.25 1966.5,904.03 2008.97,946.5 2012.75,946.5 2083,1016.75 2083,1174.35 2063,1194.35 v1(2063,1260)
NetR1_1: R1.1 R5.2 U1.2 | length 210.1
  Top Layer w10: R5.2 1522,907 1550.5,935.5 R1.1 1618.5,935.5 1624,941 U1.2
NetR2_1: R2.1 R4.2 U1.3 | length 221.6
  Top Layer w10: R2.1 1532.99,871.5 R4.2 1673.98,871.5 U1.3
NetR6_2: R6.2 U2.34 | length 257.7
  Top Layer w6: R6.2@1677.46,1814 1699.75,1814 ; 1770.5,1655.5 1778.56,1655.5 1779.03,1655.03 U2.34
  Top Layer w10: 1699.75,1814 1714,1799.75 1714,1714.8 1771.9,1656.9
NetR11_1: R11.1 U2.14 U3.1 | length 1086.3
  Top Layer w6: U2.14 2187.35,1635.35
  Top Layer w10: R11.1@2027,956 2066.66,956 2068,957.34 2068,903 v1(2039,874) ; 2187.35,1635.35 2189.69,1635.35 v1@2210.17,1655.83
  Bottom Layer w10: v1(2039,874) 2156.5,991.5 2156.5,1240.22 2123.5,1273.22 2123.5,1323 2118,1328.5 2118,1572 2199,1653 2206,1646 v1(2209,1646)
NetR12_2: R12.2 U2.11 U3.6 | length 598.8
  Top Layer w6: U2.11 2212.71,1576.29 v1(2213,1576)
  Top Layer w10: v1(2169,1285) 2169,1239.46 2178,1230.46 2178,1134.66 2177,1133.66 U3.6
  Bottom Layer w6: v1(2213,1576) 2215,1578 v1@2215,1582
  Bottom Layer w10: v1(2169,1285) 2156,1298 2156,1520.18 2211.82,1576 v1(2213,1576)
NetR13_2: R13.2 U2.12 U3.5 | length 1018.8
  Top Layer w6: U2.12 2199.98,1595.98 2202.5,1598.5 2250.5,1598.5 v1(2257,1592)
  Top Layer w10: U3.5 2227,1119 v1(2243,1135) ; U3.5@2227.83,1070.83 2273,1116 R13.2@2333.46,1116
  Bottom Layer w6: v1@2254,1592 v1(2257,1592)
  Bottom Layer w10: v1(2243,1135) 2275,1167 2275,1269 2212,1332 2212,1346.35 2189.5,1368.85 2189.5,1429.15 2203.85,1443.5 2217.13,1443.5 2240.04,1466.41 2240.04,1469.15 2254.39,1483.5 2255.5,1483.5 2311.5,1539.5 2311.5,1638.15 2297.15,1652.5 2276.85,1652.5 2262.5,1638.15 2262.5,1597.5 v1(2257,1592)
NetR16_1: R16.1 U4.1 | length 140.2
  Top Layer w6: R16.1@1859.87,1835.55 R16.1@1860.85,1834.56
  Top Layer w13: 1859.87,1941.84 1859.87,1958.08
  Top Layer w17: 1859.87,1958.08 U4.1@1859.87,1974.32
  Top Layer w35: R16.1@1859.87,1835.55 1859.87,1941.84
NetR16_2: R16.2 U2.31 | length 74.3
  Top Layer w6: 1860.85,1746.15 R16.2@1860.85,1771.57 ; U2.31 1861.09,1733.91
  Top Layer w10: 1860.85,1746.15 1860.85,1734.15 1861.09,1733.91
NetR18_1: R18.1 U5.8 | length 101.3
  Top Layer w6: 775,1801 775,1832.88 R18.1@777.22,1835.1 ; U5.8 815.4,1767.6
  Top Layer w10: 775,1801 788,1788 795,1788 815.4,1767.6
NetU2_13: U2.13 U3.2 | length 1021
  Top Layer w6: U2.13 2222.66,1615.66
  Top Layer w10: v1(2110,839) 2126,855 U3.2@2126,883 ; 2222.66,1615.66 2236,1629 v1(2236,1622)
  Bottom Layer w10: v1(2110,839) 2110,901 2172.5,963.5 2172.5,1246.85 2139.5,1279.85 2139.5,1333 2134,1338.5 2134,1544 2211.5,1621.5 2235.5,1621.5 v1(2236,1622)
R\E\S\E\T\: CN3.1 J1.10 P2.5 R14.1 U2.32 | length 1912.4
  Top Layer w6: CN3.1 v1(1689.35,1674.65) ; v1(1749.5,1713.95) 1757.6,1713.95 v1@1758.15,1714.5 ; U2.32 1841.4,1735.4 ; R14.1@2419,1918.46 2452.46,1918.46 ; 2568,2161 J1.10 J1.10@2573,2175 ; 2591,2007 P2.5
  Top Layer w10: v1@1758.15,1714.5 1786.65,1743 1833.8,1743 ; 1841.4,1735.4 1833.8,1743 ; v1(1928,1814) 1921.05,1807.05 1831.05,1807.05 1829,1805 1829,1747.8 1833.8,1743 ; 2452.46,1918.46 2484.93,1886 2545,1886 2565,1906 2565,1932.34 2575.85,1943.2 2589,1943.2 2591,1945.2 2591,2007 ; 2568,2161 2568,2082 P2.5
  Bottom Layer w6: v1(1689.35,1674.65) 1726.69,1712 1747.55,1712 v1(1749.5,1713.95)
  Bottom Layer w10: v1(1928,1814) 1945,1831 2037,1831 2072,1796 2072,1776.02 2086.5,1761.52 2086.5,1757.85 2100.85,1743.5 2157.15,1743.5 2165.65,1752 2170.63,1752 2183.5,1764.87 2183.5,1769.15 2203.35,1789 2266.72,1789 2286.22,1769.5 2319.78,1769.5 2330.9,1780.63 2333.4,1778.13 2334.28,1779 2533,1779 2617,1863 P2.5
UART1_RX: M1.22 U2.2 | length 4581.6
  Top Layer w6: U2.2 2195.13,1399.13 2214,1418 v1(2214,1419)
  Bottom Layer w6: 1290,2586 1292,2588 M1.22
  Bottom Layer w10: 1290,2586 1078,2586 804,2312 689,2312 641,2264 641,1935.37 793.77,1782.6 794.46,1782.6 876,1701.06 876,1479.97 924.19,1431.78 924.19,1398.22 915.69,1389.72 915.69,1095.31 1260,751 2305.25,751 2417,862.75 2417,1295 2298.35,1413.65 2214,1413.65 v1(2214,1419)
UART1_TX: M1.21 U2.1 | length 4387.8
  Top Layer w6: U2.1 2213.56,1379.44 v1(2214,1379)
  Bottom Layer w6: 1303,2510 M1.21 ; v1(2214,1379) v1@2215,1379
  Bottom Layer w10: 1303,2510 1083,2510 809,2236 678,2236 657,2215 657,1942 800.4,1798.6 801.09,1798.6 892,1707.69 892,1486.6 940.19,1438.4 940.19,1391.6 931.69,1383.1 931.69,1116.31 1281,767 2298.63,767 2400,868.37 2400,1277 2298,1379 v1(2214,1379)
UART_CTS: M1.16 U2.61 | length 2314.7
  Top Layer w6: U2.61 2077.62,1319.38 v1(2099,1298)
  Bottom Layer w10: M1.16 1357,2115 1410,2115 1436,2089 1436,1772.15 1383.5,1719.65 1383.5,1653.85 1397.85,1639.5 1429.78,1639.5 1446.07,1623.21 1446.07,1598.42 1460.42,1584.07 1485.21,1584.07 1536.78,1532.5 1617.5,1532.5 1732.5,1417.5 1737.15,1417.5 1751.5,1403.15 1751.5,1331.85 1818.5,1264.85 1818.5,1251.5 1847.5,1222.5 1847.5,1207.85 1828.54,1188.89 1828.54,1168.33 1784,1123.78 ; 1784,1124.56 1784,956 1809,931 1948.21,931 1995.71,978.5 1999.5,978.5 2051,1030 2051,1161.1 2002.5,1209.6 2002.5,1286.93 2015.59,1300.02 2045.75,1300.02 2046.22,1300.5 2079.78,1300.5 2080.25,1300.02 2083.55,1300.02 2083.55,1298.55 ; 2084.1,1298 v1(2099,1298)
UART_RTS: M1.7 U2.50 | length 1811.3
  Top Layer w6: 1861.09,1323.71 U2.50
  Top Layer w10: v1(1777,1248) 1777.25,1248 1778,1247.25 1792.35,1261.61 1792.35,1274.35 1798.28,1280.28 1798.28,1296.92 1817.16,1315.8 1853.18,1315.8 1861.09,1323.71
  Bottom Layer w10: M1.7 704,2117 674.5,2087.5 674.5,1966.5 790,1851 1195.65,1851 1367.5,1679.15 1367.5,1647.22 1391.22,1623.5 1423.15,1623.5 1430.07,1616.58 1430.07,1591.79 1453.79,1568.07 1475.75,1568.07 1719.5,1324.32 1719.5,1318.6 1778,1260.1 1777,1259.1 v1(1777,1248)
W\F\I\_R\S\T\: M1.1 R15.2 U2.6 | length 4245
  Top Layer w6: U2.6 2159.45,1478 2198,1478 ; 2238,1459 v1(2264.54,1459)
  Top Layer w10: 2198,1478 2219,1478 2238,1459
  Bottom Layer w6: 678,2593 736,2593 M1.1
  Bottom Layer w10: 678,2593 625,2540 625,1928.75 787.14,1766.6 787.83,1766.6 860,1694.44 860,1473.34 908.19,1425.15 908.19,1404.85 899.69,1396.35 899.69,1088.68 1026,962.37 1026,945 1236,735 2311.88,735 2433,856.12 2433,1301.63 2304.98,1429.65 2293.89,1429.65 v1(2264.54,1459)
WIND_SENSE: J2.2 R2.2 R9.2 | length 1811.9
  Top Layer w10: R2.2 1432.5,836.5 1465,869 1465,944 1428,981 1395,981 1355,941 1355,797 1385,767 2321,767 2440,886 2440,1059.8 J2.2
pads on no net: J1.7 J1.9 M1.2 M1.4 M1.5 M1.6 M1.9 M1.10 M1.11 M1.12 M1.13 M1.14 M1.17 M1.18 M1.19 M1.20 U1.7 U2.3 U2.4 U2.5 U2.7 U2.8 U2.15 U2.18 U2.26 U2.27 U2.28 U2.29 U2.30 U2.45 U2.46 U2.53 U2.59 U2.60 U2.62 U2.63 U2.64

## Polygon pours and split planes (outlines as drawn)
GND on Top Layer "GND_POUR" (solid, pour order 14): 583.82,2858.8 583.82,2872.79 668.25,2957.22 682.25,2957.22 1390.91,2957.22 1627.13,2721 2446.87,2721 2671.87,2496 2681,867 2517,703 1627.13,703 723,703 590.95,835.05
GND on Bottom Layer "GND_POUR" (solid, pour order 16): 587.98,2858.77 686.41,2957.19 1395.07,2957.19 1631.29,2720.97 2451.03,2720.97 2676.03,2495.97 2681,867 2517,703 2002,703 1631.29,703 723,703 587.98,832.08

## Keep-outs
Keep-Out Layer:
  lines w10: 590.95,835.05 723,703 2517,703 2681,867 2681,2490 2454,2717 2324,2717 1634.91,2717 1398.69,2953.22 689.38,2953.22 590.95,2854.8 590.95,835.05

## Other copper
Top Layer:
  pour cut-out: 1634.91,2717 1534.94,2617.04 600.02,2617.04 591.17,2608.18 590.95,2608.39 590.95,2854.8 689.38,2953.22 1398.69,2953.22
  pour cut-out: 1765.03,2621.96 1821.28,2621.96 1884.47,2621.96 1901.2,2621.96 1901.2,2465.14 1884.47,2464.48 1884.47,2294.45 1886.07,2273.06 cw(c1385.23,2162.17) 1897,2127.01 1897,2042.24 1884.47,2005.99 1884.47,1743.02 1874.63,1743.02 1835.26,1802.42 1835.26,2011.72 1824.43,2059.95 1824.43,2111.13 1824.43,2252.87 1835.26,2294.45 1838.21,2465.46 1664,2464.48 1664,2621.96 1706.32,2621.96 1706.32,2717 1765.03,2717
Bottom Layer:
  pour cut-out: 1664,2465.46 1901.2,2465.46 1901.2,2717 1664,2717
  pour cut-out: 1634.91,2717 1535.06,2617.16 1535.06,2615.07 598.06,2615.07 590.95,2622.17 590.95,2854.8 689.38,2953.22 1398.69,2953.22

## Silkscreen, mask and mechanical layers (free items; w line width, h text height)
Top Overlay:
  lines w10: 963.31,2463.88 1143.43,2463.88 ; 1045,2295.57 1045,2463.88 ; 1045,2394 1120.79,2394
  text "WWU Wind Feed V5 / June 2nd,2017 / Ted Fernau" at 1394,2230 h60
  text "TCK TMS TDI TDO RST" at 2175,2061 h25
  text "3.3V" at 1193,1762 h25 r12.06
  text "SOP: / 00 -> JTAG / 10 -> SWD / 01 -> FLASH" at 2405,1370 h25
  text "WIND_IN" at 1380,1241 h25 r9.29
  text "GND->" at 2246,1201 h25 r12.22
  text "WIND->" at 2266,1048 h25 r16.7
  text "12V->" at 2288,913 h25 r13.9
Bottom Overlay:
  text "Theodor Girija Martin Fernau /  / - /  /  /  WWU BSEE; WWU BA,ECON; /  / -                                             /  /  /    tedfernau@gmail.com /    (509)-701-9014" at 2488,865 h150
Top Paste:
  region: 1263,1910 1263,2001 1226,2001 1226,1910
  region: 1182,1913 1182,2004 1145,2004 1145,1913
  region: 1107,1912 1107,2003 1070,2003 1070,1912
  region: 1026,1911 1026,2002 989,2002 989,1911
  region: 947,1910 947,2001 910,2001 910,1910
  region: 870,1913 870,2004 833,2004 833,1913
  rectangle: 695,2097 786,2134
  rectangle: 695,2177 786,2214
  rectangle: 694,2255 785,2292
  rectangle: 694,2334 785,2371
  rectangle: 695,2413 786,2450
  rectangle: 695,2570 786,2607
  rectangle: 694,2492 785,2529
  rectangle: 694,2021 785,2058
  rectangle: 1309,2020 1400,2057
  rectangle: 1309,2491 1400,2528
  rectangle: 1310,2569 1401,2606
  rectangle: 1310,2412 1401,2449
  rectangle: 1309,2333 1400,2370
  rectangle: 1309,2254 1400,2291
  rectangle: 1310,2176 1401,2213
  rectangle: 1310,2096 1401,2133
  rectangle: 2160,1371 2179,1686
  rectangle: 1799,1371 1818,1683
  region: 2146,1698 2146,1717 1834,1717 1834,1698
  region: 2149,1339 2149,1358 1832,1358 1832,1339
  rectangle: 1841,1544 1974,1674
  rectangle: 2000,1543 2136,1674
  rectangle: 2001,1380 2136,1513
  rectangle: 1842,1380 1975,1513
  rectangle: 810.81,1687.15 819.81,1766.15
  rectangle: 733.81,1688.15 742.81,1768.15

## Text inside footprints (layer, text, board x,y; h text height)
P1: Top Overlay "1" at 2397,1596 h50; Top Overlay "2" at 2377,1696 h50; Top Overlay "4" at 2637,1696 h50; Top Overlay "3" at 2637,1596 h50
U5: Mechanical 1 "buck it" at 664,1674 h30 r90